# EAGLE board test8 (EAGLE 6.0)
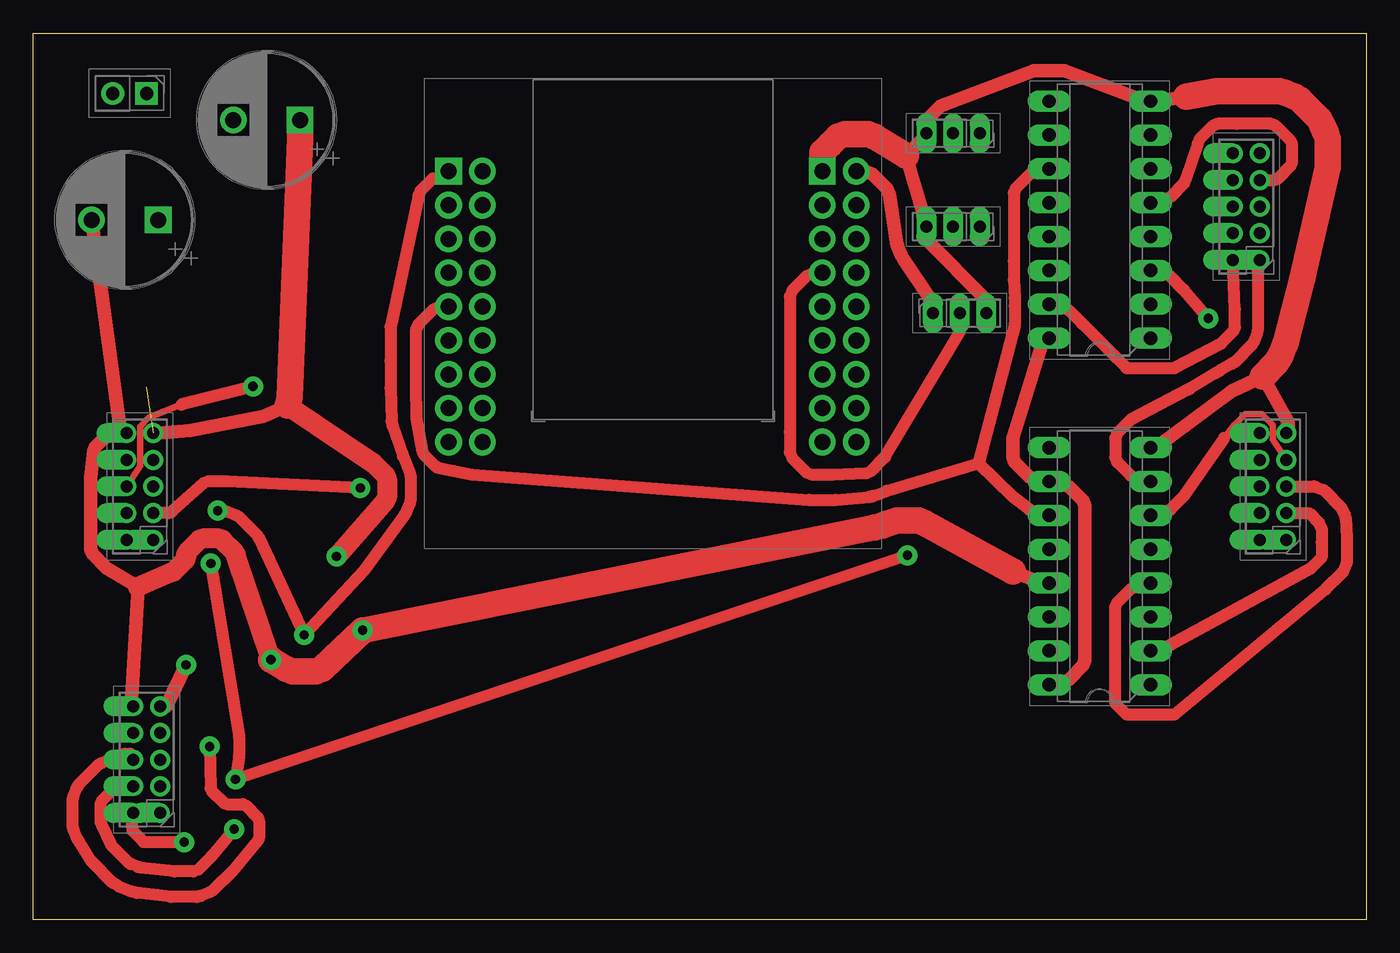
[diagram p0: board, top side]
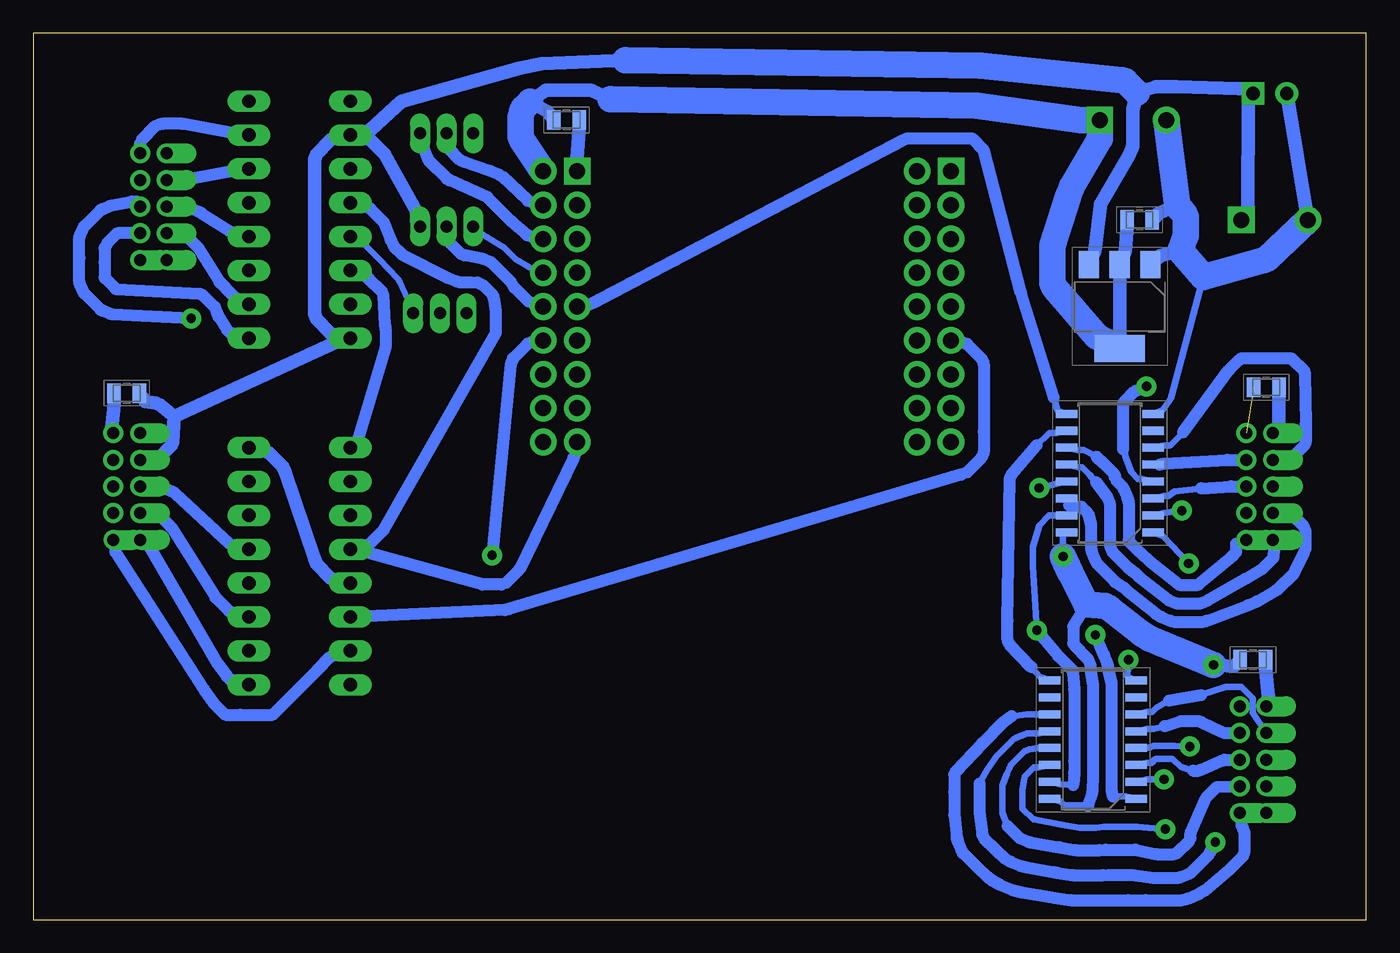
[diagram p1: board, bottom side, seen from below]

Size 100 x 66.5 mm. Coordinates in mm from the lower left corner, seen from the top.
Outline: 100,0 0,0 0,66.5 100,66.5 100,0
Copper layers 1+16: F.Cu 0.0035mm / dielectric 0.15mm / B.Cu 0.0035mm
Design rules: minimum track width 0.5mm, track to track 0.6mm, copper to edge 1mm, minimum pad ring 0.1mm, minimum via ring 0.1mm
Net classes: 0 kicad_default: width 0.9 mm, clearance 1 mm; 1 power: width 0.5 mm, clearance 1 mm to class 0, clearance 1 mm
vRestrict: area 18.1,8.2 to 22.8,18.7; area 18.2,28.2 to 22.9,38.7

## Footprints (pad centres in the part's own frame; a part is rotated, then mirrored left to right if it is on the bottom)
Capacitor_SMD:C_0805_2012Metric = smd 1.002 x 1.452: 1 -0.95,0; 2 0.95,0
Capacitor_THT:CP_Radial_D10.0mm_P5.00mm::1 = drill 1.2 pad 2 square: 1 0,0 | drill 1.2 pad 2: 2 5,0
Capacitor_THT:CP_Radial_D10.0mm_P5.00mm = drill 1.2 pad 2 square: 1 0,0 | drill 1.2 pad 2: 2 5,0
main:PinHeader_2x05_P2.00mm_Vertical = drill 0.9 pad 1.5 offset: 1 0,0; 2 2,0; 4 2,-2; 6 2,-4; 8 2,-6; 10 2,-8 | drill 0.9 pad 1.5: 3 0,-2; 5 0,-4; 7 0,-6; 9 0,-8
main:PinHeader_1x02_P2.54mm_Vertical = drill 1 pad 1.7 square: 1 0,0 | drill 1 pad 1.7: 2 0,-2.54
main:PinSocket_1x03_P2.00mm_Vertical = drill 0.9 pad 1.5 long: 1 0,0; 2 0,-2; 3 0,-4
main:PinSocket_1x03_P2.00mm_Vertical::1 = drill 0.9 pad 1.5 long: 1 0,0; 2 0,-2; 3 0,-4
main:PinHeader_2x05_P2.00mm_Vertical::1 = drill 0.9 pad 1.5 offset: 1 0,0; 2 2,0; 4 2,-2; 6 2,-4; 8 2,-6; 10 2,-8 | drill 0.9 pad 1.5: 3 0,-2; 5 0,-4; 7 0,-6; 9 0,-8
Package_SO:SOP-16_4.55x10.3mm_P1.27mm = smd 1.601 x 0.601: 1 -3.25,4.445; 2 -3.25,3.175; 3 -3.25,1.905; 4 -3.25,0.635; 5 -3.25,-0.635; 6 -3.25,-1.905; 7 -3.25,-3.175; 8 -3.25,-4.445; 9 3.25,-4.445; 10 3.25,-3.175; 11 3.25,-1.905; 12 3.25,-0.635; 13 3.25,0.635; 14 3.25,1.905; 15 3.25,3.175; 16 3.25,4.445
Package_TO_SOT_SMD:SOT-223-3_TabPin2 = smd 2.003 x 1.503: 1 -3.15,2.3; 2 -3.15,0; 3 -3.15,-2.3 | smd 2.004 x 3.804: 2@1 3.15,0
main:ESP32-WROOM-32 = drill 1.2 pad 2 square: 1 12.7,12.835; 5 -15.35,12.835 | drill 1.2 pad 2: 2 15.24,12.835; 3 12.7,10.295; 4 -12.81,12.835; 6 -12.81,10.295; 7 -15.35,10.295; 8 -12.81,7.755; 9 -15.35,7.755; 10 -12.81,5.215; 11 -15.35,5.215; 12 -12.81,2.675; 13 -15.35,2.675; 14 -12.81,0.135; 16 -15.35,0.135; 17 -12.81,-2.405; 18 -15.35,-2.405; 19 -12.81,-4.945; 20 -15.35,-4.945; 21 -12.81,-7.485; 22 -15.35,-7.485; 23 12.7,-7.485; 24 15.24,-7.485; 25 12.7,-4.945; 26 15.24,-4.945; 27 12.7,-2.405; 28 15.24,-2.405; 29 12.7,0.135; 30 15.24,0.135; 31 12.7,2.675; 33 15.24,2.675; 34 15.24,7.755; 35 15.24,10.295; 36 12.7,5.215; 37 12.7,7.755; 38 15.24,5.215
Package_DIP:DIP-16_W7.62mm_LongPads = drill 1 pad 1.6 long: 1 0,0; 2 0,-2.54; 3 0,-5.08; 4 0,-7.62; 5 0,-10.16; 6 0,-12.7; 7 0,-15.24; 8 0,-17.78; 9 7.62,-17.78; 10 7.62,-15.24; 11 7.62,-12.7; 12 7.62,-10.16; 13 7.62,-7.62; 14 7.62,-5.08; 15 7.62,-2.54; 16 7.62,0

## Placement (x,y rotation side)
C1  [Capacitor_SMD:C_0805_2012Metric]  93,39.5 0 bottom
C2  [Capacitor_THT:CP_Radial_D10.0mm_P5.00mm::1]  9.37,52.5 180 top
C3  [Capacitor_SMD:C_0805_2012Metric]  60,60 180 bottom
C4  [Capacitor_THT:CP_Radial_D10.0mm_P5.00mm]  20,60 180 top
C5  [Capacitor_SMD:C_0805_2012Metric]  17,52.5 180 bottom
C6  [Capacitor_SMD:C_0805_2012Metric]  7.5,39.94 180 bottom
C7  [Capacitor_SMD:C_0805_2012Metric]  8.5,19.5 180 bottom
J1  [main:PinHeader_2x05_P2.00mm_Vertical]  9,28.5 180 top
J2  [main:PinHeader_2x05_P2.00mm_Vertical]  9.5,8 180 top
J3  [main:PinHeader_1x02_P2.54mm_Vertical]  8.5,62 270 top
J4  [main:PinSocket_1x03_P2.00mm_Vertical]  71,59 270 top
J5  [main:PinSocket_1x03_P2.00mm_Vertical]  71,52 270 top
J6  [main:PinSocket_1x03_P2.00mm_Vertical::1]  67.5,45.5 90 top
J7  [main:PinHeader_2x05_P2.00mm_Vertical::1]  94,28.5 180 top
J8  [main:PinHeader_2x05_P2.00mm_Vertical::1]  92,49.5 180 top
U1  [Package_SO:SOP-16_4.55x10.3mm_P1.27mm]  19.23,33.5 180 bottom
U2  [Package_SO:SOP-16_4.55x10.3mm_P1.27mm]  20.5,13.5 180 bottom
U3  [Package_TO_SOT_SMD:SOT-223-3_TabPin2]  18.5,46 270 bottom
U4  [main:ESP32-WROOM-32]  46.5,43.32 0 top
U5  [Package_DIP:DIP-16_W7.62mm_LongPads]  83.82,17.62 180 top
U6  [Package_DIP:DIP-16_W7.62mm_LongPads]  83.82,43.62 180 top

## Library data of the parts
C1-C7 J1-J8 U1-U6 = TopoR

## Nets
+3.3V [power]: C3.2 C4.1 C5.2 C6.2 C7.2 J1.9 J2.9 J6.1 U1.16 U2.16 U3.2 U3.2@1 U4.2
+5V [power]: C1.2 C2.1 J3.1 J5.1 J7.8 U3.3 U5.10 U5.16 U6.10 U6.16
CLK_165: U1.1 U2.2 U4.30
CS_165: U1.2 U2.1 U4.5
GND [power]: C1.1 C2.2 C3.1 C4.2 C5.1 C6.1 C7.1 J1.10 J2.10 J3.2 J4.3 J5.3 J6.3 J7.9 U1.8 U1.15 U2.8 U2.15 U3.1 U4.1 U4.38 U5.8 U5.13 U6.8 U6.13
H34P: J5.2 U4.33
MISO_165: U1.9 U4.31
Net-(J1-Pin_1): J1.1 U1.11
Net-(J1-Pin_2): J1.2 U1.12
Net-(J1-Pin_3): J1.3 U1.13
Net-(J1-Pin_4): J1.4 U1.14
Net-(J1-Pin_5): J1.5 U1.3
Net-(J1-Pin_6): J1.6 U1.4
Net-(J1-Pin_7): J1.7 U1.5
Net-(J1-Pin_8): J1.8 U1.6
Net-(J2-Pin_1): J2.1 U2.11
Net-(J2-Pin_2): J2.2 U2.12
Net-(J2-Pin_3): J2.3 U2.13
Net-(J2-Pin_4): J2.4 U2.14
Net-(J2-Pin_5): J2.5 U2.3
Net-(J2-Pin_6): J2.6 U2.4
Net-(J2-Pin_7): J2.7 U2.5
Net-(J2-Pin_8): J2.8 U2.6
Net-(J4-Pin_1): J4.1 U4.34
Net-(J4-Pin_2): J4.2 U4.35
Net-(J7-Pin_1): J7.1 U5.15
Net-(J7-Pin_2): J7.2 U5.1
Net-(J7-Pin_3): J7.3 U5.2
Net-(J7-Pin_4): J7.4 U5.3
Net-(J7-Pin_5): J7.5 U5.4
Net-(J7-Pin_6): J7.6 U5.5
Net-(J7-Pin_7): J7.7 U5.6
Net-(J8-Pin_1): J8.1 U5.7
Net-(J8-Pin_2): J8.2 U6.15
Net-(J8-Pin_3): J8.3 U6.1
Net-(J8-Pin_4): J8.4 U6.2
Net-(J8-Pin_5): J8.5 U6.3
Net-(J8-Pin_6): J8.6 U6.4
Net-(J8-Pin_7): J8.7 U6.5
Net-(J8-Pin_8): J8.8 U6.6
Net-(J8-Pin_9): J8.9 U6.7
Net-(U1-DS): U1.10 U2.9
Net-(U4-IO13): U4.16 U5.14
Net-(U4-IO14): U4.13 U5.11 U6.11
Net-(U4-IO15): U4.23 U5.12 U6.12
Net-(U5-QH'): U5.9 U6.14
RX433: J6.2 U4.36
unconnected-(J7-Pin_10-Pad10): J7.10
unconnected-(J8-Pin_10-Pad10): J8.10
unconnected-(U1-~{Q7}-Pad7): U1.7
unconnected-(U2-DS-Pad10): U2.10
unconnected-(U2-~{Q7}-Pad7): U2.7
unconnected-(U4-EN-Pad3): U4.3
unconnected-(U4-IO0-Pad25): U4.25
unconnected-(U4-IO2-Pad24): U4.24
unconnected-(U4-IO4-Pad26): U4.26
unconnected-(U4-IO5-Pad29): U4.29
unconnected-(U4-IO12-Pad14): U4.14
unconnected-(U4-IO16-Pad27): U4.27
unconnected-(U4-IO17-Pad28): U4.28
unconnected-(U4-IO23-Pad37): U4.37
unconnected-(U4-IO25-Pad10): U4.10
unconnected-(U4-IO26-Pad11): U4.11
unconnected-(U4-IO27-Pad12): U4.12
unconnected-(U4-IO32-Pad8): U4.8
unconnected-(U4-IO33-Pad9): U4.9
unconnected-(U4-IO34-Pad6): U4.6
unconnected-(U4-IO35-Pad7): U4.7
unconnected-(U4-SCK{slash}CLK-Pad20): U4.20
unconnected-(U4-SCS{slash}CMD-Pad19): U4.19
unconnected-(U4-SDI{slash}SD1-Pad22): U4.22
unconnected-(U4-SDO{slash}SD0-Pad21): U4.21
unconnected-(U4-SENSOR_VP-Pad4): U4.4
unconnected-(U4-SHD{slash}SD2-Pad17): U4.17
unconnected-(U4-SWP{slash}SD3-Pad18): U4.18
unconnected-(U6-QH'-Pad9): U6.9

## Tracks (layer width: path | path; a pad name or v marks a point on that pad's centre or on a via)
+3.3V  (via drill 0.7 pad 1.5)  (1 unrouted)
  F.Cu 1: v11.46,19.11 9.95,16 J2.9 | J1.9 9.45,36.5 11.77,36.68 17.21,37.75 17.57,37.9 19.08,38.56 | J6.1 67.25,45.9 67.25,46.4 67.25,46.61 65.29,49.54 65.12,49.83 64.83,50.53 64.75,50.86 64.24,54.39 64.05,54.84 62.96,55.92 62.51,56.11 U4.2
  F.Cu 1.5: 19.08,38.56 25.48,34.27 26.43,33.32 26.54,33.05 26.54,31.7 26.43,31.43 v22.75,27.25
  F.Cu 2: 19.08,38.56 19.24,39.2 20,58.59 20,59 C4.1
  B.Cu 0.5: U2.16 22.96,8.88 22.68,8.6 22.58,8.56 21.42,8.56 20.88,8.57 | U1.16 22.75,29 22.75,28.75 v22.75,27.25
  B.Cu 0.9: 21,23.64 21.93,22.11 21.99,21.97 21.99,20.75 21.93,20.61 20.91,19.57 20.89,19.55 20.69,19.07 20.69,19.04 20.68,18.82 20.68,18.68 20.5,17.59 20.5,12.21 20.5,10.68 20.54,9.78 20.56,9.54 20.88,8.57
  B.Cu 1: C3.2 61.41,60.61 61.41,60.62 62.73,61.37 61.61,62.19 61.52,62.23 59.37,62.23 58.23,62.23 58.18,62.22 58.09,62.18 56.69,61.55 | C5.2 17.95,51.77 17.95,51.67 18.07,50.14 U3.2 18.5,48.15 18.5,43.85 18.5,43.35 U3.2@1 | C7.2 9.94,18.98 9.97,18.98 v11.46,19.11
  B.Cu 2: v11.46,19.11 15.3,20.69 16.19,21.06 16.27,21.09 16.77,21.4 16.89,21.48 19.29,23.39 19.62,23.52 21,23.64 22.17,25.95 22.21,26.02 v22.75,27.25 | U3.2@1 20.2,43.75 20.21,43.76 23.37,47.36 23.43,47.48 23.54,47.74 23.55,47.85 23.55,49.2 23.55,50.45 23.54,50.56 22.36,54.31 22.09,54.98 20,58.59 20,59 C4.1 21,60 21.41,60 29.2,61.05 56.69,61.55 | U4.2 61.91,56.33 63.32,58.49 63.43,58.76 63.45,58.85 63.45,60.2 63.32,60.65 63.23,60.87 62.73,61.37
+5V
  F.Cu 1: U6.16 75.81,43.62 73.5,36.14 73.5,34.67 73.66,34.29 74.69,33.26 75.07,33.11 75.81,32.86 U5.10 76.6,32.86 77.34,32.62 77.72,32.47 78.75,31.44 78.91,31.06 78.91,20.9 78.91,19.43 78.75,19.05 77.72,18.02 77.34,17.87 76.6,17.62 U5.16
  B.Cu 1: C2.1 8.87,53 8.87,53.5 8.87,53.71 8.85,60.94 8.85,61.15 8.85,61.65 J3.1 8.85,62.35 9.35,62.35 9.56,62.35 14.23,62.5 15.77,62.5 17.21,62.04 17.5,60.77 17.5,58.1 17.55,57.92 17.79,57.32 19.9,53.73 19.93,53.64 19.95,53.55 20.37,50.16 20.37,50.14 U3.3 | J5.1 71.25,52.4 71.25,52.9 71.25,53.11 73.66,57.44 74.69,58.47 75.07,58.62 75.81,58.86 | 75.81,58.86 U6.10 | 89.42,37.75 89.55,35.83 89.66,35.56 90.61,34.61 90.88,34.5 91.55,34.5 J7.8 | U6.10 76.6,58.86 77.34,58.62 77.72,58.47 78.75,57.44 78.91,57.06 78.91,46.9 78.91,45.43 78.75,45.05 77.72,44.02 77.34,43.86 76.6,43.62 | 76.6,43.62 U6.16 76.6,43.62 | 76.6,43.62 89.42,37.75 | C1.2 91.59,38.89 91.59,38.88 90.83,38.75 90.47,38.6 89.42,37.75 | U6.10 75.81,58.86 | 75.81,58.86 75.07,59.11 74.69,59.26 72.41,61.36 72.32,61.4 63.5,63.87 61.85,64.23 55.57,64.5
  B.Cu 2: 17.21,62.04 18.06,62.89 18.33,63 28.91,64.05 55.57,64.5
CLK_165  (via drill 0.7 pad 1.5)
  F.Cu 0.9: v13.32,26.71 15.43,13.69 15.43,12.26 v15.17,10.52 v65.59,27.33
  B.Cu 0.5: U2.2 16.45,10.5 v15.17,10.52 | U1.1 15.25,28.78 v13.32,26.71
  B.Cu 0.9: U4.30 62.5,43.36 62.94,43.18 64.01,42.11 64.19,41.67 v65.59,27.33
CS_165  (via drill 0.7 pad 1.5)
  F.Cu 0.9: U4.5 30.6,55.6 30.15,55.6 29.96,55.6 29.7,55.34 29.05,54.69 28.91,54.33 26.8,44.46 26.8,41.92 26.8,39.91 26.87,37.38 26.95,37.04 27.74,34.76 28.23,33.54 28.29,33.31 28.29,31.44 28.23,31.21 27.97,30.58 27.85,30.37 24.81,26.19 v20.32,21.36 16.95,28.61 16.8,28.85 15.45,30.2 15.21,30.34 14.56,30.61 14.28,30.68 v13.83,30.68
  B.Cu 0.5: U2.1 18.05,9.23 18.06,9.23 19,9.23 | U1.2 15.19,30.5 v13.83,30.68
  B.Cu 0.9: 19,9.23 19.09,9.75 19.09,17.77 19.37,18.91 19.38,19.06 19.43,19.26 19.68,19.87 v20.32,21.36
GND  (via drill 0.7 pad 1.5)
  F.Cu 1: J7.9 94.15,36.5 94.15,37.23 93.99,37.61 92.24,40.75 89.9,39.64 89.75,39.55 84.22,35.41 U5.8 | 86.52,61.73 84.22,61.41 U6.8 83.43,61.41 77.34,63.7 76.54,63.7 75.07,63.7 68.33,61.15 68.06,61.04 67.11,60.09 67,59.82 67,59.15 J4.3 67,58.85 65.48,57.33 67,52.15 J5.3 67,51.85 67,51.18 67.11,50.91 71.39,46.59 71.5,46.32 71.5,45.65 J6.3 | J2.10 7.35,16 7.86,24.95 5.47,26.4 4.45,27.42 4.3,27.78 4.3,29.22 4.3,33.22 4.55,35.17 4.66,35.44 5.61,36.39 5.88,36.5 6.55,36.5 | U5.13 75.81,25.25 75.07,25.48 73.51,26.12 | 6.55,36.5 J1.10 6.55,36.5 | 6.55,36.5 C2.2
  F.Cu 1.5: v17.84,19.5 15.19,27.36 15.1,27.58 14.19,28.49 13.97,28.58 12.68,28.58 12.46,28.49 11.55,27.58 11.46,27.36 11.46,27.14 11.39,26.97 10.53,26.11 7.86,24.95
  F.Cu 2: v17.84,19.5 18.98,18.82 19.47,18.62 19.52,18.61 21.13,18.61 21.17,18.62 21.66,18.82 21.7,18.84 v24.7,21.71 63.11,29.42 63.7,29.57 63.79,29.6 64.78,29.96 64.79,29.96 66.38,29.96 66.4,29.96 66.87,29.76 73.51,26.12 | U4.1 59.2,57.15 59.2,57.57 59.79,58.15 60.34,58.7 60.38,58.73 60.88,58.94 60.93,58.95 62.55,58.95 62.6,58.94 63.1,58.73 65.48,57.33 | 86.52,61.73 88.81,62.15 90.89,62.15 93.49,62.15 93.9,62.05 94.65,61.74 95,61.52 96.47,60.06 96.69,59.7 97,58.95 97.1,58.54 97.1,56.46 95.2,48.08 93.97,43.28 93.95,43.21 93.58,42.34 93.55,42.28 93.26,41.79 93.2,41.7 92.24,40.75
  B.Cu 0.5: U2.15 22.96,10.15 22,10.1 | U6.13 75.81,51.25 74.96,50.45 74.06,49.55 72.63,48.06 72.53,47.88 71.5,45.65 J6.3 | U2.8 17.93,18.24 17.93,18.26 v17.84,19.5 | J5.3 67,51.85 64.7,50.42 63.83,49.55 62.82,48.97 62.46,48.82 U4.38 | U1.8 15.25,38.22 14.67,39.11 14.57,39.35 12.2,48.2 | U1.15 23.28,30.33 23.75,30.33 23.8,30.31 24.53,29.57 25,27.97 25,26.52 v24.7,21.71
  B.Cu 0.9: v24.7,21.71 23.1,19.78 22.09,18.77 22,18.67 22,18.64 21.99,18.49 21.91,17.25 21.91,11.88 21.91,11.01 21.91,10.95 21.98,10.13 22,10.1
  B.Cu 1: C1.1 93.95,38.77 93.95,38.65 94.1,37.22 94.15,36.5 J7.9 | 14.17,53.58 15.55,53.02 15.56,53.02 C5.1 | J2.10 7.35,16 7.35,16.73 7.55,18.65 7.55,18.77 C7.1 | U3.1 15.46,49.83 15.44,49.83 13.95,50.19 | U5.8 83.43,35.41 82.69,35.17 82.31,35.01 81.28,33.98 81.12,33.6 78.91,27.05 78.75,26.67 77.72,25.64 77.34,25.48 76.6,25.25 U5.13 | C6.1 6.55,39.21 6.55,36.5 J1.10 | J3.2 C2.2 | C3.1 59.05,59.27 59.05,59.15 59.2,57.15 U4.1
  B.Cu 2: C4.2 14.17,53.58 13.66,52.97 13.55,52.7 13.55,51.35 13.57,51.26 13.95,50.19 12.2,48.2 7.69,49.5 7.43,49.61 C2.2
H34P
  B.Cu 0.9: U4.33 62.48,46.21 62.86,46.37 63.9,47.41 64.16,47.83 65.31,48.99 65.59,49.27 65.71,49.34 66.26,49.57 66.39,49.6 67.67,49.85 67.94,49.96 68.89,50.91 69,51.18 69,51.85 J5.2
MISO_165
  B.Cu 0.5: U1.9 23.16,38.24 23.16,38.25 23.44,39.17
  B.Cu 0.9: 23.44,39.17 25.89,47.03 28.7,57.72 28.73,57.78 29.52,58.58 29.59,58.6 30.71,58.6 34.45,58.6 34.89,58.42 58,46.26 58.44,46.08 U4.31
Net-(J1-Pin_1)
  B.Cu 0.5: U1.11 21.69,35.23 21.17,35.23 20.23,34.73
  B.Cu 0.9: 20.23,34.73 19.68,34.21 18.9,33.43 18.88,33.38 18.86,33.24 18.74,32.93 18.32,32.51 18.19,32.3 17.92,31.66 17.88,31.52 17.82,31.27 17.82,28.47 17.82,28.44 17.81,28.42 17.79,28.36 17.17,27.75 17.15,27.72 16.39,27.03 16.21,26.85 14.05,25.14 13.92,25.09 12.72,25.09 12.59,25.14 10.01,27.3 9.75,27.56 9.75,27.75 9.75,28.2 J1.1
Net-(J1-Pin_2)
  B.Cu 0.5: U1.12 21.69,33.96 21.68,33.96 21.3,33.94 20.76,33.4 20.28,32.83
  B.Cu 0.9: 20.28,32.83 19.41,31.67 19.23,31.24 19.23,31.09 19.23,28.11 19.22,28.03 19.04,27.58 19.02,27.56 17.94,26.47 17.29,25.97 17.04,25.72 14.88,24.02 14.86,24 14.78,23.95 14.25,23.73 14.16,23.71 12.48,23.71 12.39,23.73 11.86,23.95 9.06,25.56 7.77,26.33 6.98,27.12 6.95,27.19 6.85,28.5 J1.2
Net-(J1-Pin_3)  (via drill 0.7 pad 1.5)
  F.Cu 0.9: v24.53,32.38 14.55,32.88 13.12,32.88 12.78,32.74 10.39,30.61 10.12,30.5 9.45,30.5 J1.3
  B.Cu 0.5: U1.13 23.28,32.69 v24.53,32.38
Net-(J1-Pin_4)
  B.Cu 0.5: U1.14 22.3,31.54 22.3,31.29 22.3,31.1
  B.Cu 0.9: 22.3,31.1 22.2,31 21.97,30.96 21.35,30.96 20.89,30.5 20.64,29.64 20.64,27.83 20.58,27.56 20.31,26.91 20.16,26.67 18.82,25.33 18.8,25.31 18.16,24.89 17.89,24.63 15.75,22.92 15.72,22.9 15.4,22.71 14.69,22.41 14.33,22.32 12.31,22.32 11.96,22.41 8.88,23.58 8.18,23.87 6.79,24.68 6.65,24.76 5.41,26 5.33,26.14 4.66,27.56 4.55,27.83 4.55,29.17 4.66,29.44 5.61,30.39 5.88,30.5 6.55,30.5 J1.4
Net-(J1-Pin_5)
  B.Cu 0.5: U1.3 15.19,31.77 15.18,31.77 14.83,31.79 14.45,32.08 14.39,32.11 12.37,32.34
  B.Cu 0.9: 12.37,32.34 10.12,32.5 9.45,32.5 J1.5
Net-(J1-Pin_6)  (via drill 0.7 pad 1.5)
  F.Cu 0.5: 11.1,38.63 8.67,37.65 8,36.98 8,34.02 J1.6
  F.Cu 0.9: v16.49,40 11.1,38.63
  B.Cu 0.5: U1.4 16.78,33.04 17.13,33.07 17.63,33.57 17.64,33.62 17.64,33.64 18.02,34.68 18.23,35.3
  B.Cu 0.9: 18.23,35.3 18.23,38.66 18.22,38.72 18.19,38.78 18.14,38.85 17.34,39.64 17.32,39.66 v16.49,40
Net-(J1-Pin_7)
  B.Cu 0.5: U1.5 15.51,34.14
  B.Cu 0.9: 15.51,34.14 15.21,34.21 15.15,34.21 10.41,34.5 9.45,34.5 J1.7
Net-(J1-Pin_8)
  B.Cu 0.5: U1.6 15.19,35.58 14.78,35.58 14.67,35.6 13.94,36.34 13.73,36.56
  B.Cu 0.9: 13.73,36.56 10.3,41.22 9.51,42.02 9.42,42.07 9.36,42.1 9.26,42.12 6.86,42.12 5.74,42.12 5.64,42.1 5.58,42.07 5.49,42.02 4.7,41.22 4.64,41.14 4.62,41.08 4.6,40.98 4.55,37.17 4.55,35.83 4.66,35.56 5.61,34.61 5.88,34.5 6.55,34.5 J1.8
Net-(J2-Pin_1)
  B.Cu 0.5: U2.11 24.55,15.41 25.47,15.41 26.61,15.26
  B.Cu 0.9: 26.61,15.26 27.28,14.75 28.79,13.24 30.81,11.09 30.9,10.86 30.9,9.55 30.9,7.86 30.71,6.09 30.65,5.84 30.38,5.21 30.26,5 28.94,3.68 28.31,3.12 28.14,2.99 27.6,2.67 27.49,2.61 26.56,2.23 26.44,2.19 25.84,2.04 23.78,1.69 23.37,1.62 22.14,1.45 17.86,1.45 16.57,1.45 16.19,1.44 13.95,1.44 13.91,1.44 13.41,1.57 13.39,1.57 12.56,1.92 12.55,1.93 12.1,2.19 12.07,2.21 10.26,3.75 9.26,4.75 9.11,5.09 9.11,6.52 9.26,6.86 9.35,7.06 9.35,7.25 9.35,7.7 J2.1
Net-(J2-Pin_2)  (via drill 0.7 pad 1.5)
  F.Cu 0.9: v11.31,5.81 11.26,5.8 10.14,5.8 8.34,5.8 8.27,5.83 7.48,6.62 7.45,6.69 7.35,8 J2.2
  B.Cu 0.5: U2.12 24.54,13.96 25.44,13.96 25.61,13.91 26.2,13.67 26.28,13.63 26.46,13.52 27.75,12.24 27.83,12.15 28.25,11.54 28.42,11.25 29,10.21
  B.Cu 0.9: 29,10.21 29,8.04 28.81,6.37 28.71,6.14 27.79,5.22 27.08,4.57 26.69,4.34 25.91,4.01 25.47,3.9 23.4,3.55 23.22,3.52 22.01,3.33 21.99,3.33 19.77,3.33 19.33,3.35 17.56,3.35 15.99,3.12 14.14,3.12 13.93,3.17 13.31,3.43 13.12,3.54 11.83,4.84 11.72,5.02 v11.31,5.81
Net-(J2-Pin_3)
  B.Cu 0.5: U2.13 24.55,12.87 24.61,12.87 25,12.82 25.27,12.76 25.63,12.61 26.65,11.59 26.66,11.56 26.77,11.34 26.94,10.93 27.28,10.08 27.29,10.04 27.3,10.01 27.3,9.71 27.3,8.1 27.29,8.04 27.28,8 26.91,7.02
  B.Cu 0.9: 26.91,7.02 26.01,6.13 25.94,6.08 25.42,5.87 25.31,5.82 25.23,5.8 23.05,5.42 21.76,5.21 20,5.21 19.56,5.25 17.33,5.25 17.31,5.24 15.72,4.9 14.42,4.9 14.2,4.99 13.28,5.91 13.19,6.13 13.19,6.46 13.1,6.68 12.12,8.93 11.91,9.25 11.2,9.96 9.95,10 J2.3
Net-(J2-Pin_4)  (via drill 0.7 pad 1.5)
  F.Cu 0.9: v15.07,6.78 13.37,4.75 12.37,3.75 12.03,3.61 10.6,3.61 8.02,3.9 7.86,3.94 7.29,4.18 7.15,4.26 5.91,5.5 5.83,5.64 5.16,7.06 5.05,7.33 5.05,8.67 5.16,8.94 6.11,9.89 6.38,10 7.05,10 J2.4
  B.Cu 0.5: U2.14 24.54,11.42 24.94,11.42 25.49,10.87 25.59,10.76 25.66,10.58 25.8,9.72 25.8,9.42 25.8,8.39 25.79,8.33 25.76,8.28 25.02,7.55 24.97,7.52 24.92,7.5 22.84,7.12 21.49,6.89 20.27,6.89 19.67,6.95 17.18,6.95 v15.07,6.78
Net-(J2-Pin_5)
  B.Cu 0.5: U2.3 16.45,11.77 16.09,11.77 15.84,12.01 15.75,12.05 14.59,12.05 14.5,12.01 13.92,11.47 13.81,11.42 12.99,11.16
  B.Cu 0.9: 12.99,11.16 12.59,11.16 12.39,11.24 10.89,11.89 10.62,12 9.95,12 J2.5
Net-(J2-Pin_6)  (via drill 0.7 pad 1.5)
  F.Cu 0.9: v13.23,12.98 13.3,9.87 13.39,9.65 14.3,8.74 14.52,8.65 15.71,8.65 15.93,8.56 16.85,7.65 16.94,7.42 16.94,6.13 16.85,5.91 14.9,3.59 13.53,2.22 13.27,2.06 12.59,1.78 12.29,1.71 10.34,1.71 7.79,2 7.77,2 7.27,2.13 7.26,2.13 6.44,2.47 6.42,2.48 5.98,2.74 5.97,2.76 4.41,4.32 4.39,4.34 3.46,5.79 3.31,6.05 3.03,6.73 2.95,7.03 2.95,8.97 3.03,9.27 3.31,9.95 3.46,10.21 4.84,11.59 5.1,11.74 5.78,12.03 6.86,12.45 7.24,12.45 7.5,12.19 J2.6
  B.Cu 0.5: U2.4 16.45,12.87 16.39,12.87 15.95,13.04 14.39,13.04 v13.23,12.98
Net-(J2-Pin_7)
  B.Cu 0.5: U2.5 16.45,14.31 15.94,14.31 15.11,14.49
  B.Cu 0.9: 15.11,14.49 13.88,14.89 12.57,14.89 12.33,14.79 10.89,14.11 10.62,14 9.95,14 J2.7
Net-(J2-Pin_8)
  B.Cu 0.5: U2.6 16.45,15.58 16.05,15.58 15.73,15.9 14.79,16.43 | 12.4,16.85 10.51,17.45 9.39,17.45 9.32,17.42 8.53,16.63 8.5,16.56 8.5,15.52 J2.8
  B.Cu 0.9: 14.79,16.43 12.4,16.85
Net-(J4-Pin_1)
  B.Cu 0.9: U4.34 62.5,51.16 62.94,51.34 64.11,52.37 65.95,54.21 68.77,55.46 68.97,55.58 70.27,56.88 70.39,57.08 70.64,57.7 70.7,57.91 70.7,58.1 70.7,58.55 J4.1
Net-(J4-Pin_2)
  B.Cu 0.9: U4.35 62.49,53.77 62.9,53.94 64.79,55.73 65.05,55.89 65.73,56.17 67.67,56.85 67.94,56.96 68.89,57.91 69,58.18 69,58.85 J4.2
Net-(J7-Pin_1)
  B.Cu 0.9: J7.1 93.85,28.2 93.85,27.75 93.85,27.56 87.21,17.29 86.45,16.2 85.65,15.4 85.59,15.38 84.46,15.38 82.06,15.38 82,15.4 81.2,16.2 78.71,18.71 77.69,19.73 77.33,19.88 76.6,20.17 U5.15
Net-(J7-Pin_2)
  B.Cu 0.9: J7.2 91.55,28.5 86.16,19.2 85.47,18.24 85.21,17.97 85.03,17.97 84.57,17.97 U5.1
Net-(J7-Pin_3)
  F.Cu 0.9: J7.3 94.45,30.5 95.72,30.5 96.45,29.77 96.62,29.43 96.65,29.36 96.65,28.31 96.65,27.19 96.62,27.12 95.83,26.33 85.31,20.6 84.95,20.45 84.22,20.17 U5.2
Net-(J7-Pin_4)
  B.Cu 0.9: J7.4 91.55,30.5 90.88,30.5 90.61,30.39 89.66,29.44 86.33,24.16 85.31,23.14 84.95,23 84.22,22.7 U5.3
Net-(J7-Pin_5)
  F.Cu 0.9: J7.5 94.45,32.5 96.07,32.5 96.21,32.47 96.77,32.23 96.89,32.16 98.11,30.94 98.18,30.82 98.42,30.26 98.45,30.12 98.55,28.63 98.55,26.87 98.51,26.71 98.27,26.14 98.19,26 96.95,24.76 85.65,15.4 85.59,15.38 84.46,15.38 82.06,15.38 82,15.4 81.2,16.2 81.18,16.26 81.18,17.39 81.18,23.43 81.32,23.79 82.34,24.81 82.7,24.95 83.43,25.25 U5.4
Net-(J7-Pin_6)
  B.Cu 0.9: J7.6 91.55,32.5 90.59,32.5 90.31,32.43 89.65,32.16 89.4,32.01 85.31,28.22 84.95,28.08 84.22,27.78 U5.5
Net-(J7-Pin_7)
  F.Cu 0.5: 89.35,36.15 90.13,37.13 90.92,37.92 90.99,37.95 92.11,37.95 92.18,37.92 92.97,37.13 93,37.06 93,36.02 J7.7
  F.Cu 0.9: 89.35,36.15 86.33,31.78 85.31,30.76 84.95,30.61 84.22,30.33 U5.6
Net-(J8-Pin_1)
  F.Cu 0.9: J8.1 91.87,49.2 91.87,48.75 91.87,44.18 91.81,43.95 91.55,43.33 91.43,43.13 90.13,41.83 89.93,41.71 89.09,41.24 88.66,40.98 86.77,39.83 86.64,39.75 82.34,37.51 81.32,36.49 81.18,36.13 81.18,34.68 81.32,34.32 82.34,33.3 82.7,33.16 83.43,32.86 U5.7
Net-(J8-Pin_2)
  F.Cu 0.9: U6.15 76.6,46.17 77.33,45.88 77.69,45.73 78.71,44.71 81.2,42.2 82,41.4 82.06,41.38 84.46,41.38 85.59,41.38 85.65,41.4 89.1,43.21 90.05,44.16 90.16,44.43 90.16,45.78 J8.2
Net-(J8-Pin_3)
  B.Cu 0.9: J8.3 92.45,51.5 93.72,51.5 94.45,50.77 94.62,50.43 94.65,50.36 94.65,49.31 94.65,48.19 94.62,48.12 93.83,47.33 93.76,47.3 87.51,46.95 87.3,46.87 86.39,45.96 86.3,45.75 86.21,45.49 86.1,45.23 85.47,44.24 85.21,43.97 85.03,43.97 84.57,43.97 U6.1
Net-(J8-Pin_4)
  B.Cu 0.9: J8.4 89.55,51.5 88.88,51.5 88.61,51.39 87.66,50.44 86.03,47.82 85.11,46.9 84.22,46.17 U6.2
Net-(J8-Pin_5)  (via drill 0.7 pad 1.5)
  F.Cu 0.9: v88.16,45.1 86.33,47.25 85.31,48.27 84.95,48.42 84.22,48.7 U6.3
  B.Cu 0.9: v88.16,45.1 94.08,45.4 94.24,45.44 94.81,45.68 94.95,45.76 96.19,47 96.27,47.14 96.51,47.71 96.55,47.87 96.55,49.63 96.55,51.13 96.51,51.29 96.27,51.86 96.19,52 94.95,53.24 94.81,53.32 94.24,53.56 94.08,53.6 92.61,53.88 92.29,53.88 92.07,53.66 92.07,53.53
Net-(J8-Pin_6)
  B.Cu 0.9: J8.6 89.55,53.5 88.59,53.5 88.31,53.43 87.65,53.16 87.4,53.01 85.31,51.68 84.95,51.53 84.22,51.25 U6.4
Net-(J8-Pin_7)
  F.Cu 0.9: J8.7 92.45,55.5 93.12,55.5 93.39,55.61 94.34,56.56 94.45,56.83 94.45,58.17 94.34,58.44 93.39,59.39 93.2,59.56 92.86,59.7 90.26,59.7 88.84,59.7 88.5,59.56 87.49,58.55 87.35,58.21 86.47,55.6 86.33,55.24 85.31,54.22 84.95,54.08 84.22,53.78 U6.5
Net-(J8-Pin_8)
  B.Cu 0.9: J8.8 89.55,55.5 88.88,55.5 84.22,56.33 U6.6
Net-(J8-Pin_9)
  B.Cu 0.9: U6.7 84.22,58.86 88.84,59.7 90.26,59.7 90.55,59.65 90.88,59.52 91.87,58.53 92,58.2 J8.9
Net-(U1-DS)
  B.Cu 0.5: U2.9 24.48,18.22 25.12,18.93 | U1.10 23.28,36.5 23.73,36.5 23.79,36.48 24.73,35.58
  B.Cu 0.9: 25.12,18.93 26.76,20.66 26.9,21 26.9,22.42 26.73,33.09 26.59,33.43 24.73,35.58
Net-(U4-IO13)
  B.Cu 0.9: U4.16 30.39,43.36 29.95,43.18 28.88,42.11 28.7,41.67 28.7,36.59 28.7,35.07 28.88,34.64 29.95,33.56 30.39,33.38 64.31,23.31 64.61,23.23 75.81,22.7 U5.14
Net-(U4-IO14)
  F.Cu 0.9: U4.13 30.39,45.9 29.95,45.72 28.88,44.65 28.7,44.22 28.7,41.67 28.7,40.15 28.73,37.62 29.18,35.17 29.29,34.91 30.23,33.97 30.48,33.87 32.93,33.38 58.19,31.48 60.21,31.48 62.72,31.72 63.02,31.8 64.04,32.17 70.92,34.21 | U6.11 75.81,56.33 75.08,56.03 74.72,55.89 73.7,54.87 73.56,54.51 73.56,49.43 73.56,47.98 73.63,46.63 73.63,46.05 73.63,44.65 70.92,34.21 | U5.11 75.81,30.33 75.08,30.61 74.72,30.76 73.5,31.7 70.92,34.21
Net-(U4-IO15)
  B.Cu 0.9: U6.12 75.81,53.78 75.08,53.5 74.72,53.35 73.7,52.33 73.56,51.97 73.2,51.04 73.17,50.97 72.99,50.59 72.26,49.86 68.92,48.17 68.25,47.89 67.97,47.82 67.19,47.82 66.7,47.8 66.65,47.78 66.25,47.61 65.54,46.9 65.43,46.44 65.3,45.66 65.3,45.16 65.3,44.04 65.33,43.97 73.7,29.24 74.72,28.22 75.08,28.08 75.81,27.78 | 75.81,27.78 U5.12 75.81,27.78 | U4.23 59.29,35.07 59.47,34.64 63.53,26.28 64.53,25.27 64.87,25.13 66.3,25.13 75.81,27.78
Net-(U5-QH')
  B.Cu 0.9: U6.14 75.81,48.7 74.83,48.11 73.86,47.14 73.74,46.85 73.63,44.65 73.59,44.34 73.59,42.91 75.81,35.41 U5.9
RX433
  F.Cu 0.9: U4.36 58.44,48.44 58,48.26 56.93,47.19 56.75,46.75 56.75,36.59 56.75,35.07 56.93,34.64 58,33.56 58.44,33.38 59.96,33.38 62.48,33.5 62.87,33.66 63.91,34.7 69.5,44.08 69.5,45.35 J6.2